# EAGLE board Hat_MCP3912 (EAGLE 6.5.0)
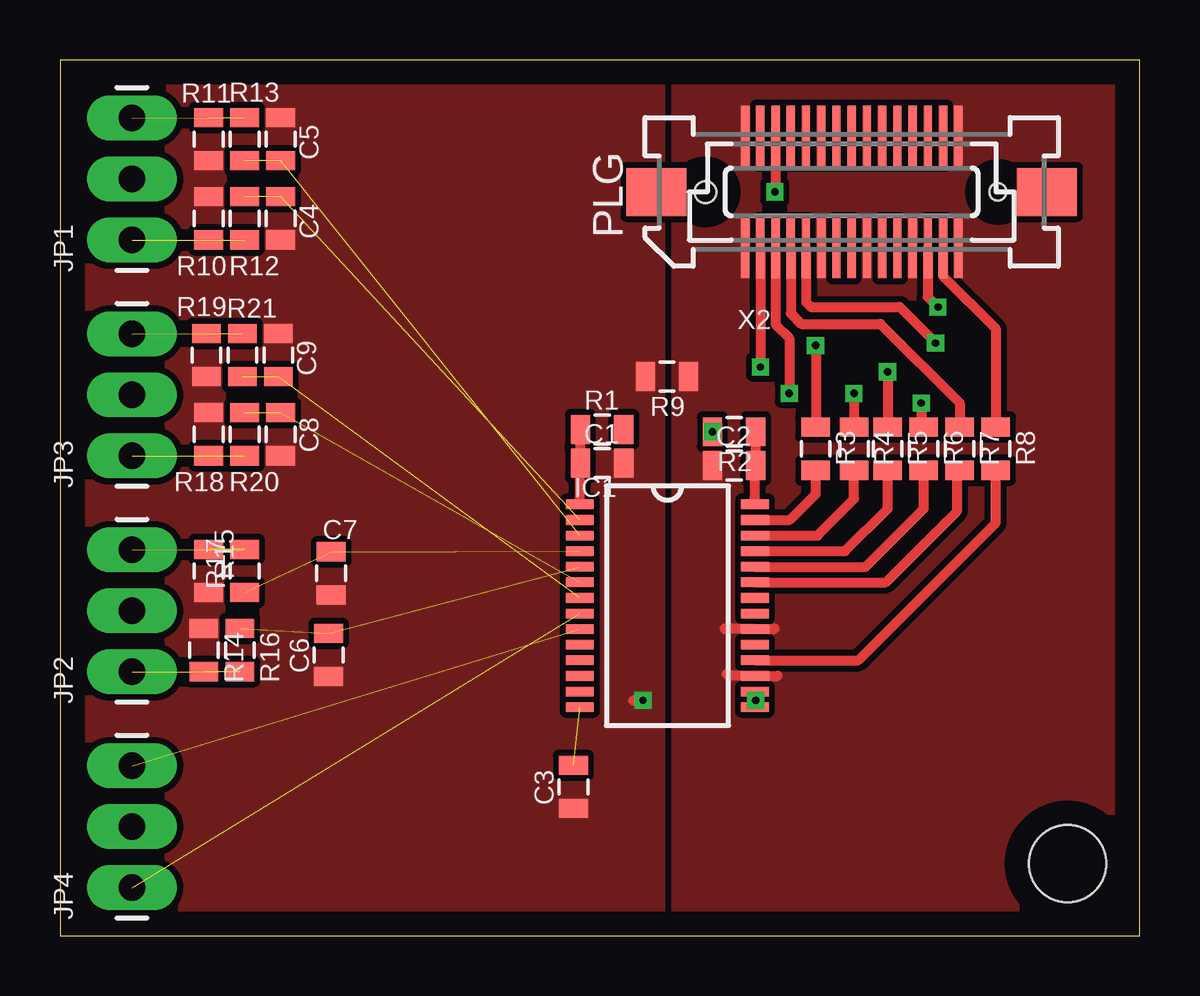
[diagram p0: board, top side]
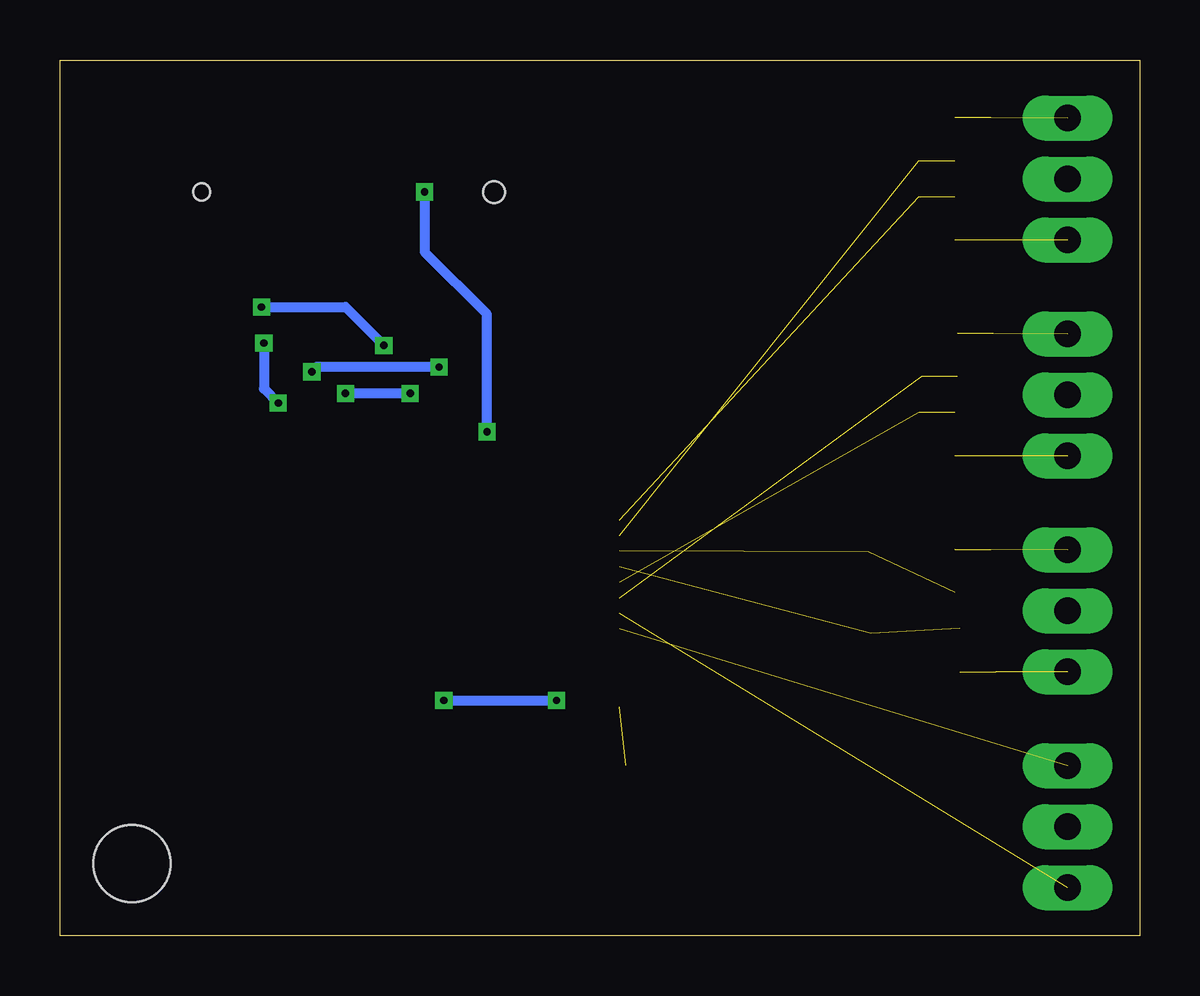
[diagram p1: board, bottom side, seen from below]

Size 45 x 36.5 mm. Coordinates in mm from the lower left corner, seen from the top.
Outline: 0,0 45,0 45,36.5 0,36.5 0,0
Copper layers (1*16): Top 0.035mm / dielectric 1.5mm / Bottom 0.035mm
Design rules "default": minimum track width 10mil, minimum drill 24mil, track to track 8mil, track to pad 8mil, pad to pad 8mil, via to via 8mil, smd to smd 8mil, copper to edge 40mil, drill to drill 8mil, minimum pad ring 10mil, minimum via ring 8mil, stop-mask expansion 4mil, vias tented up to drill 0mil, thermal gap 10mil
Holes 3.2 mm at 42,3

## Footprints (pad centres in the part's own frame; a part is rotated, then mirrored left to right if it is on the bottom)
0805 = smd 0.8 x 1.2: 1 -0.9,0; 2 0.9,0
SSOP28 = smd 1.154 x 0.4: 1 -3.65,4.225; 2 -3.65,3.575; 3 -3.65,2.925; 4 -3.65,2.275; 5 -3.65,1.625; 6 -3.65,0.975; 7 -3.65,0.325; 8 -3.65,-0.325; 9 -3.65,-0.975; 10 -3.65,-1.625; 11 -3.65,-2.275; 12 -3.65,-2.925; 13 -3.65,-3.575; 14 -3.65,-4.225; 15 3.65,-4.225; 16 3.65,-3.575; 17 3.65,-2.925; 18 3.65,-2.275; 19 3.65,-1.625; 20 3.65,-0.975; 21 3.65,-0.325; 22 3.65,0.325; 23 3.65,0.975; 24 3.65,1.625; 25 3.65,2.275; 26 3.65,2.925; 27 3.65,3.575; 28 3.65,4.225
1X03_LONGPADS = drill 1.118 pad 1.88 long: 1 0,0; 2 2.54,0; 3 5.08,0
52885-0374 = smd 0.35 x 2.5: 1 -4.445,-2.35; 2 -4.445,2.35; 3 -3.81,-2.35; 4 -3.81,2.35; 5 -3.175,-2.35; 6 -3.175,2.35; 7 -2.54,-2.35; 8 -2.54,2.35; 9 -1.905,-2.35; 10 -1.905,2.35; 11 -1.27,-2.35; 12 -1.27,2.35; 13 -0.635,-2.35; 14 -0.635,2.35; 15 0,-2.35; 16 0,2.35; 17 0.635,-2.35; 18 0.635,2.35; 19 1.27,-2.35; 20 1.27,2.35; 21 1.905,-2.35; 22 1.905,2.35; 23 2.54,-2.35; 24 2.54,2.35; 25 3.175,-2.35; 26 3.175,2.35; 27 3.81,-2.35; 28 3.81,2.35; 29 4.445,-2.35; 30 4.445,2.35 | smd 2.5 x 2: M1 -8.137,0; M2 8.137,0 | hole 0.9: -6.098,0 | hole 0.7: 6.098,0

## Placement (x,y rotation side)
C1  .1uF  [0805]  22.6,19.7 0 top
C2  .1uF  [0805]  28.1,19.6 0 top
C3  .1uF  [0805]  21.4,6.2 90 top
C4  10nF  [0805]  9.2,29.9 90 top
C5  10nF  [0805]  9.2,33.2 90 top
C6  10nF  [0805]  11.2,11.7 90 top
C7  10nF  [0805]  11.3,15.1 270 top
C8  10nF  [0805]  9.2,20.9 90 top
C9  10nF  [0805]  9.1,24.2 90 top
IC1  MCP3912  [SSOP28]  25.32,13.75 0 top
JP1  M03LONGPADS  [1X03_LONGPADS]  3,29 90 top
JP2  M03LONGPADS  [1X03_LONGPADS]  3,11 90 top
JP3  M03LONGPADS  [1X03_LONGPADS]  3,20 90 top
JP4  M03LONGPADS  [1X03_LONGPADS]  3,2 90 top
R1  10  [0805]  22.6,21.1 0 top
R2  10  [0805]  28.1,21 180 top
R3  10  [0805]  31.5,20.3 270 top
R4  10  [0805]  33.1,20.3 270 top
R5  10  [0805]  34.5,20.3 270 top
R6  10  [0805]  36,20.3 270 top
R7  10  [0805]  37.5,20.3 270 top
R8  10  [0805]  39,20.3 270 top
R9  0  [0805]  25.3,23.3 180 top
R10  5  [0805]  6.2,29.9 270 top
R11  5  [0805]  6.2,33.2 270 top
R12  130  [0805]  7.7,29.9 270 top
R13  130  [0805]  7.7,33.2 90 top
R14  5  [0805]  6,11.9 270 top
R15  5  [0805]  6.2,15.2 270 top
R16  130  [0805]  7.5,11.9 270 top
R17  130  [0805]  7.7,15.2 90 top
R18  5  [0805]  6.2,20.9 270 top
R19  5  [0805]  6.1,24.2 270 top
R20  130  [0805]  7.7,20.9 270 top
R21  130  [0805]  7.6,24.2 90 top
X2  52885-0374  [52885-0374]  33,31 0 top

## Library data of the parts
C1-C9 IC1 JP1-JP4 R1-R21 = SensorCape
X2 = SensorCape; MPN: 52760-0379; OC_FARNELL: unknown; OC_NEWARK: 92M6431

## Nets
AGND: C1.2 C3.1 C4.1 C5.2 C6.1 C7.2 C8.1 C9.2 IC1.15 IC1.16 R9.2 R10.1 R11.2 R14.1 R15.2 R18.1 R19.2
GND: C2.1 IC1.17 IC1.20 R9.1 X2.1 X2.2 X2.11 X2.17 X2.23 X2.29 X2.30
MISO: R5.1 X2.3
MOSI: R4.1 X2.5
N$1: C1.1 IC1.1 R1.1
N$2: IC1.27 R3.2
N$3: IC1.26 R4.2
N$4: IC1.25 R5.2
N$5: IC1.24 R6.2
N$6: IC1.23 R7.2
N$7: IC1.18 R8.2
N$8: C2.2 IC1.28 R2.1
N$9: C3.2 IC1.14
N$10: JP1.1 R10.2 R12.2
N$11: JP1.3 R11.1 R13.2
N$12: JP2.1 R14.2 R16.2
N$13: C4.2 IC1.2 R12.1
N$14: C5.1 IC1.3 R13.1
N$15: JP2.3 R15.1 R17.2
N$16: C6.2 IC1.5 R16.1
N$17: C7.1 IC1.4 R17.1
N$18: JP3.1 R18.2 R20.2
N$19: JP3.3 R19.1 R21.2
N$20: C8.2 IC1.6 R20.1
N$21: C9.1 IC1.7 R21.1
N$22: IC1.8 JP4.1
N$23: IC1.9 JP4.3
SCK: R6.1 X2.9
SCL: X2.15
SDA: X2.13
SS: R7.1 X2.7
U1RX: X2.21
U1TX: X2.19
U3RX: R8.1 X2.27
U3TX: R3.1 X2.25
VDD3V3_A: R1.2
VDD3V3_D: R2.2 X2.6
VDD5V0_D: X2.4

## Tracks (layer width: path | path; a pad name or v marks a point on that pad's centre or on a via)
AGND  (via drill 0.3)
  Top 0.406: IC1.16 IC1.15 29,9.55 v29,9.8 | v24.3,9.8 23.9,9.8
  Bottom 0.406: v29,9.8 v24.3,9.8
  pour Top (isolate 0.254, no thermals): 0,37 25,37 25,0 0,0
GND
  Top 0.406: 29.8,12.8 29.77,12.78 IC1.20 27.73,12.78 27.7,12.8 | 27.8,10.9 27.88,10.82 IC1.17 29.93,10.82
  pour Top (isolate 0.254, rank 2, no thermals): 25,37 45,37 45,0 25,0
MISO  (via drill 0.3)
  Top 0.406: X2.3 v29.19,23.71 v29.2,23.7 | v34.5,23.5 R5.1
  Bottom 0.406: v29.2,23.7 34.3,23.7 v34.5,23.5
MOSI  (via drill 0.3)
  Top 0.406: X2.5 29.82,25.48 30.4,24.9 v30.4,22.6 | v33.1,22.6 R4.1
  Bottom 0.406: v30.4,22.6 v33.1,22.6
N$1
  Top 0.406: IC1.1 21.67,19.67 C1.1 R1.1
N$2
  Top 0.406: IC1.27 30.43,17.32 31.5,18.4 R3.2
N$3
  Top 0.406: IC1.26 31.57,16.68 33.1,18.2 R4.2
N$4
  Top 0.406: IC1.25 32.73,16.02 34.5,17.8 R5.2
N$5
  Top 0.406: IC1.24 33.58,15.38 36,17.8 R6.2
N$6
  Top 0.406: IC1.23 34.42,14.72 37.4,17.7 37.4,19.3 R7.2
N$7
  Top 0.406: IC1.18 33.27,11.47 39,17.2 R8.2
N$8
  Top 0.406: IC1.28 28.97,19.57 C2.2 R2.1
N$9  (1 unrouted)
N$10  (2 unrouted)
N$11  (2 unrouted)
N$12  (2 unrouted)
N$13  (2 unrouted)
N$14  (2 unrouted)
N$15  (2 unrouted)
N$16  (2 unrouted)
N$17  (2 unrouted)
N$18  (2 unrouted)
N$19  (2 unrouted)
N$20  (2 unrouted)
N$21  (2 unrouted)
N$22  (1 unrouted)
N$23  (1 unrouted)
SCK  (via drill 0.3)
  Top 0.406: X2.9 31.09,26.41 31.3,26.2 35,26.2 v36.5,24.7 | v35.9,22.2 35.9,21.3 R6.1
  Bottom 0.406: v36.5,24.7 36.5,22.8 v35.9,22.2
SS
  Top 0.406: X2.7 30.46,25.94 30.9,25.5 34.2,25.5 37.5,22.2 R7.1
U3RX
  Top 0.406: X2.27 36.81,27.49 39,25.3 R8.1
U3TX  (via drill 0.3)
  Top 0.406: v31.5,24.6 R3.1 | X2.25 36.17,26.62 v36.6,26.2
  Bottom 0.406: v31.5,24.6 33.1,26.2 v36.6,26.2
VDD3V3_D  (via drill 0.3)
  Top 0.406: X2.6 29.82,31.02 v29.8,31
  Bottom 0.406: v29.8,31 29.8,28.5 27.2,25.9 R2.2
  other vias: 27.2,21